# Altium PCB PCB1.PcbDoc
Units mil, origin at the board's own origin, x right, y up, seen from the top; angles counter-clockwise.
Board outline 4173.23 x 3188.98 mil, 2 copper layers (Top Layer, Bottom Layer); 3 components, 0 nets, 12 pads, 0 vias.
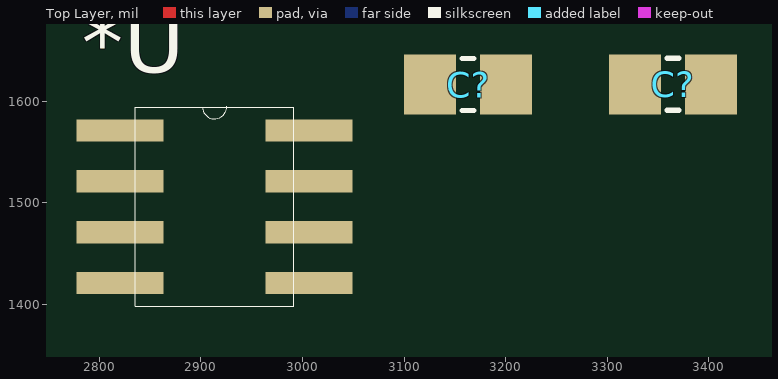
[diagram p0: Top Layer view]
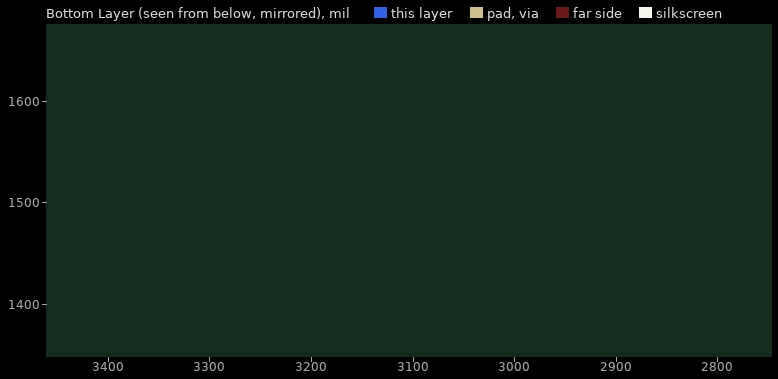
[diagram p1: Bottom Layer view, seen from below]

## Layer stack, top to bottom
Top Solder: solder mask 0.4, Solder Resist, Dk 3.5
Top Layer: signal copper 1.4
Dielectric 1: dielectric 12.6, FR-4, Dk 4.8
Bottom Layer: signal copper 1.4
Bottom Solder: solder mask 0.4, Solder Resist, Dk 3.5

## Board outline
0,0 4173.23,0 4173.23,3188.98 0,3188.98

## Design rules (kind name [scope] priority, off if disabled: settings)
Clearance [All] p1: gap=10 ignorepadtopadclearanceinfootprint=FALSE except(0: Arc-Hole Track-Hole SMDPad-Hole THPad-Hole Via-Hole Fill-Hole Poly-Hole Region-Hole Text-Hole)
PolygonConnect [All] p1: connectstyle=Relief reliefconductorwidth=10 reliefentries=4 polygonreliefangle="90 Angle" airgapwidth=10
RoutingVias [All] p1: holewidth=28 width=50 viastyle="Through Hole" minholewidth=28 minwidth=50 maxholewidth=28 maxwidth=50
SolderMaskExpansion [All] p1: expansion=4 istentingtop=FALSE
Width [All] p1: maxlimit=10 minlimit=10 preferedwidth=10
30 further rules are at their usual default settings.

## Classes and differential pairs
component class Sheet1: *U C?

## Components (designator, comment, footprint, x,y, rotation, side; value= is the part's Value field where it differs from the comment)
*U "CMP1" "AD627 8-SOIC" 2913.39,1496.06 r0 top
C? "CMP2" "CAP 0805" 3364.52,1616.59 r0 top
C? "CMP3" "CAP 0603" 3088.93,1577.22 r0 top

## Footprints (in the part's own frame and the unit in brackets; to place one, negate y for a bottom-side part, rotate by r counter-clockwise, add the part's x,y. Pads: shape width x height; smd on the part's side, far side on the other; paste and mask are expansions set on the pad)
"AD627 8-SOIC" [mil]
  rect 86x22 smd: 1(-93,75) 2(-93,25) 3(-93,-25) 4(-93,-75) 5(93,-75) 6(93,-25) 7(93,25) 8(93,75)
  silkscreen extent -78,-98 78,99, body extent -118,-95 118,98, height 69
"CAP 0603" [mm]
  rect 1.3x1.5 smd: 1(0.93,0.991) 2(2.83,0.991)
  silkscreen extent 1.73,0.34 2.03,1.64, body extent 0.88,0.37 2.88,1.62, height 0.6
"CAP 0805" [mm]
  rect 1.3x1.5 smd: 1(-0.95,0) 2(0.95,0)
  silkscreen extent -0.15,-0.65 0.15,0.65, body extent -1,-0.63 1,0.63, height 0.6

## Part data
*U: "Instrumentation Amplifier AD627", Package="SOIC-8 Analog Devices", Availability=Warning, ComponentLink1Description="New link", ComponentLink1URL=http://www.tme.vn/Product.aspx?id=2272&fbclid=IwAR1r3-aYSaNjoE7f3PSriBxNBMmIgj82tOKJ_9gO5Z10qRkidb9YGGOgiqw#page=pro_info, DigiKey-Purchase-URL=https://snapeda.com/shop?store=DigiKey&id=558411, MF="Analog Devices", MP=AD627AR, Price=None, SnapEDA_Link=https://www.snapeda.com/parts/AD627AR/Analog%20Devices%20Inc./view-part/558411/?ref=snap
C?: "CAP 0805", Package="0805 Yageo", Availability="In Stock", Check_prices=https://www.snapeda.com/parts/CC0805KKX5R7BB106/Yageo/view-part/?ref=eda, MF=Yageo, MP=CC0805KKX5R7BB106, Price=None, Purchase-URL=https://pricing.snapeda.com/search/part/CC0805KKX5R7BB106/?ref=eda, SnapEDA_Link=https://www.snapeda.com/parts/CC0805KKX5R7BB106/Yageo/view-part/?ref=snap
C?: "CAP 0603", Package=None, Availability=Unavailable, MP=CC0603KRX5R9BB105, Price=None

## Nets (pads, with @x,y where several pads share a name; then routed paths per layer and width w, separated by ;. In a path a pad name is that pad's centre, name@x,y a point inside that pad or via, vN(x,y) a via of type N, cw(c..) or ccw(c..) an arc to the next point about the centre after c; other vN are vias at no path point)
pads on no net: *U.1 *U.2 *U.3 *U.4 *U.5 *U.6 *U.7 *U.8 C?.1 C?.2